# Altium PCB Copy of PCB1.PcbDoc (part 2 of 2)
Units mm, origin at the board's own origin, x right, y up, seen from the top; angles counter-clockwise.
Board outline 100 x 100 mm, 2 copper layers (Top Layer, Bottom Layer); 110 components, 80 nets, 503 pads, 102 vias.
Unrouted connection lines stored in the file: 45.
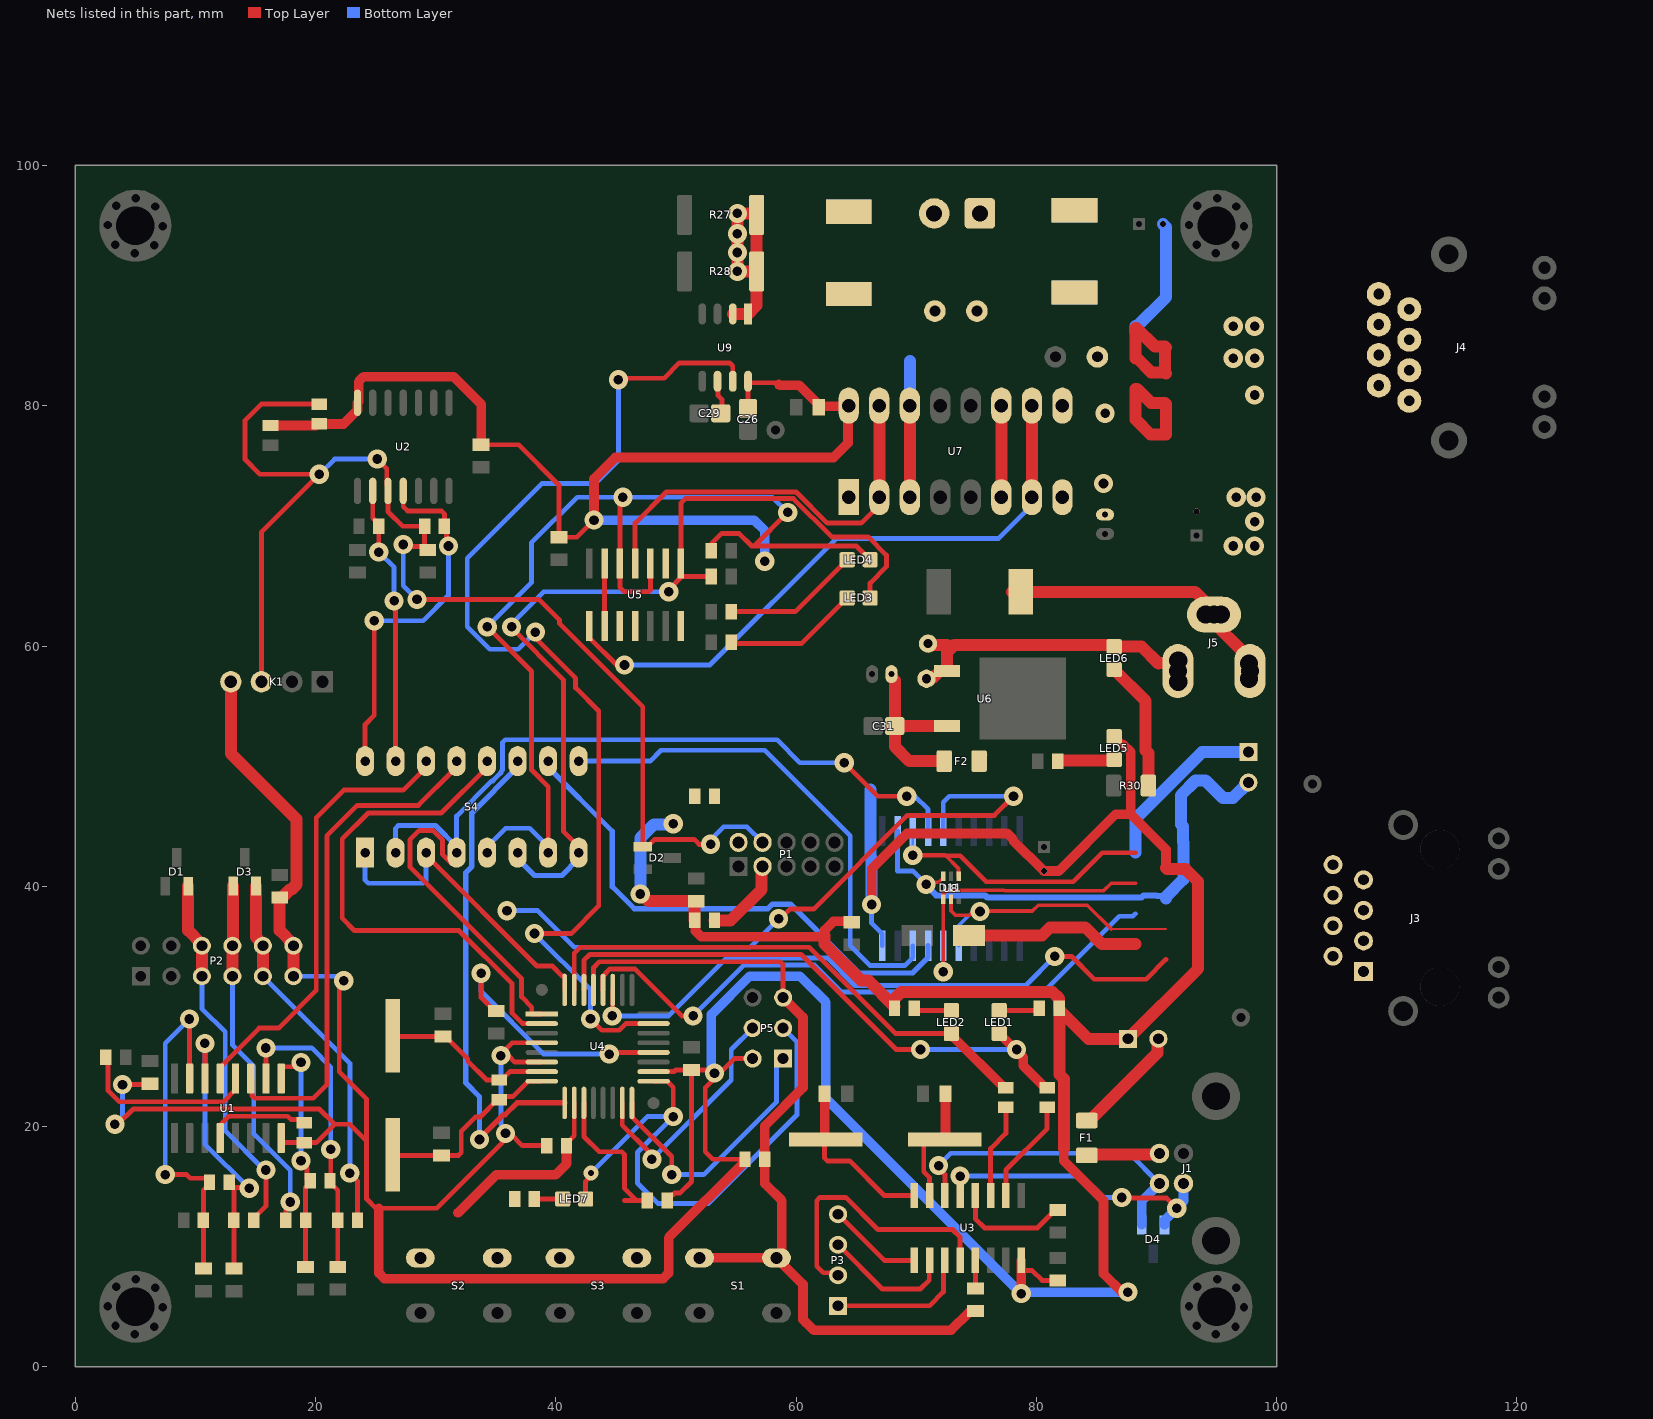
[diagram p2: the nets of this part, all layers, seen from the top]

## Via types
v1: diameter 1.6, hole 0.8, Top Layer to Bottom Layer, 101 vias
v2: diameter 1.27, hole 0.5, Top Layer to Bottom Layer, 1 vias

## Nets (pads, with @x,y where several pads share a name; then routed paths per layer and width w, separated by ;. In a path a pad name is that pad's centre, name@x,y a point inside that pad or via, vN(x,y) a via of type N, cw(c..) or ccw(c..) an arc to the next point about the centre after c; other vN are vias at no path point) (continued)
2A: C11.2 D2.1 K1.3 P1.4 R11.1 R20.1 U2.3 | length 104
  Top Layer w0.4: K1.3@15.494,57.023 15.494,69.469 20.066,74.041 20.066,74.295 15.367,74.295 14.136,75.526 14.136,78.779 15.493,80.136 R11.1@20.32,80.136 ; v1(25.146,75.565) 25.935,74.776 25.935,73.379 26.035,73.279 26.035,71.188 27.246,69.977 R20.1@29.083,69.977 29.083,68.25 29.046,68.287 27.471,68.287 v1(27.305,68.453) ; v1(28.448,63.881) 38.599,63.881 40.308,62.172 40.308,61.887 47.244,54.951 D2.1@47.244,43.307 47.624,43.307 48.224,43.907 51.519,43.907 51.935,43.491 v1(52.889,43.491) ; P1.4@57.152,43.718 P1.4@57.214,43.656
  Bottom Layer w0.4: v1(20.32,74.295) 21.59,75.565 v1(25.146,75.565) ; v1(27.305,68.453) 27.305,65.024 v1(28.448,63.881) ; v1(52.889,43.491) 52.946,43.548 52.946,43.929 53.975,44.958 55.912,44.958 P1.4@57.214,43.656
3: D1.1 P2.5 P2.6 R5.1 | length 31
  Top Layer w0.4: R5.1@14.859,12.192 14.859,12.367 15.875,13.383 v1(15.875,16.383)
  Top Layer w1: D1.1@9.398,40.005 9.398,36.33 10.541,35.187 P2.6@10.541,35.052 P2.5@10.541,32.512
  Bottom Layer w0.4: P2.5@10.541,32.512 10.541,29.823 12.481,27.883 12.481,19.65 15.748,16.383 v1(15.875,16.383)
4: D3.2 P2.7 P2.8 R6.1 | length 30
  Top Layer w0.4: R6.1@17.527,12.192 17.527,13.336 v1(17.907,13.716)
  Top Layer w1: P2.7@13.081,32.512 P2.8@13.081,35.052 13.114,35.085 13.114,39.985 D3.2@13.147,40.018
  Bottom Layer w0.4: P2.7@13.081,32.512 13.081,26.797 14.859,25.019 14.859,19.394 17.907,16.346 v1(17.907,13.716)
5: D3.1 P2.9 P2.10 R7.2 | length 31.3
  Top Layer w0.4: v1(22.86,16.129) 23.495,15.494 R7.2@23.495,12.192
  Top Layer w1: D3.1@15.047,40.018 15.047,35.761 15.621,35.187 P2.10@15.621,35.052 P2.9@15.621,32.512
  Bottom Layer w0.4: P2.9@15.621,32.512 22.86,25.273 v1(22.86,16.129)
6: C1.1 C2.1 C8.1 C12.1 C13.1 C14.1 C21.1 C22.1 C24.POS C25.2 C26.2 F2.2 J3.8 K1.4 LED5.A P2.11 P2.12 P4.1 P5.2 R1.2 R2.1 R3.1 R10.2 R11.2 R13.1 R15.2 R17.1 R18.1 R21.1 R31.1 U1.16 U2.14 U3.16 U4.4 U4.6 U4.18 U5.14 U7.16 U8.20 U9.8 | length 512.5
  Top Layer w0.4: v1(3.302,20.193) 3.556,20.193 4.826,21.463 20.32,21.463 21.59,20.193 ; v1(3.937,23.495) 6.147,23.495 C12.1@6.223,23.571 ; U1.16@17.145,19.05 17.145,18.769 17.245,18.669 R13.1@19.05,18.669 20.066,18.669 21.59,20.193 ; v1(22.352,32.131) 21.971,31.75 21.971,24.575 24.257,22.289 24.257,18.796 ; C13.1@33.782,76.759 36.906,76.759 40.259,73.406 C22.1@40.259,69.063 41.758,69.063 v1(43.18,70.485) ; U4.6@38.842,25.371 36.605,25.371 36.068,25.908 v1(35.433,25.908) 35.433,26.035 36.369,26.971 U4.4@38.842,26.971 ; R18.1@39.243,18.415 37.211,18.415 36.195,19.431 v1(35.814,19.431) 35.595,19.212 35.595,18.704 30.099,13.208 25.019,13.208 24.257,13.97 24.257,18.796 ; U4.18@48.142,24.571 49.866,24.571 50.01,24.714 C14.1@51.308,24.714 ; R21.1@49.275,13.843 49.275,14.018 49.55,14.293 49.725,14.293 49.891,14.459 50.34,14.459 51.308,15.427 C14.1@51.308,24.714 ; C2.1@51.562,38.633 51.688,38.759 C2.1@51.689,38.76 ; v1@53.435,24.225 52.451,23.241 52.451,17.907 53.086,17.272 R17.1@55.753,17.272 ; C26.2@56.007,79.767 U9.8@56.007,82.03 ; U9.8@56.007,82.042 U9.8@56.007,82.03 ; P5.2@56.388,25.654 54.864,25.654 53.911,24.701 53.899,24.714 C14.1@51.308,24.714 ; 58.547,81.788 58.42,81.915 56.122,81.915 U9.8@56.007,82.03 ; F2.2@75.237,50.419 F2.2@75.745,50.927 ; U3.16@78.74,8.13 78.858,8.012 79.662,8.012 80.485,7.188 C8.1@81.788,7.188 ; 87.851,46.007 87.851,46.054 ; 21.59,20.193 22.86,20.193 24.257,18.796
  Top Layer w0.8: R15.2@16.256,78.358 20.017,78.358 20.145,78.486 R11.2@20.32,78.486 22.33,78.486 23.495,79.651 U2.14@23.495,80.251 23.595,80.351 23.595,82.015 24.003,82.423 31.496,82.423 33.782,80.137 C13.1@33.782,76.759 ; 25.273,13.208 25.273,7.801 25.742,7.332 48.934,7.332 49.403,7.801 49.403,10.747 55.753,17.097 R17.1@55.753,17.272 ; v1(43.18,70.485) 43.18,73.914 44.958,75.692 63.119,75.692 64.325,76.898 64.325,79.947 61.963,79.947 61.963,80.01 60.275,81.698 58.637,81.698 58.547,81.788 ; R10.2@51.562,37.16 51.637,37.085 51.637,36.283 52.106,35.814 62.357,35.814 ; v1(53.213,24.447) v1@53.213,24.638 ; v1@57.314,67.146 v1(57.404,67.056) ; 62.357,35.91 62.357,36.322 63.119,37.084 64.465,37.084 64.592,36.957 C25.2@64.643,37.008 ; v1(66.294,38.481) 66.294,41.456 69.237,44.399 77.597,44.399 78.032,43.964 78.032,43.869 80.626,41.275 C24.POS@80.645,41.275 81.882,41.275 86.614,46.007 87.851,46.007 90.795,43.063 90.795,41.529 ; v1(78.74,6.096) 78.74,8.13 U3.16@78.74,8.862 ; 82.296,18.161 82.296,17.145 85.598,13.843 85.598,7.747 87.122,6.223 v1(87.63,6.223) ; LED5.A@86.487,52.451 87.157,51.781 87.278,51.781 87.851,51.208 87.851,46.054
  Top Layer w1: K1.4@12.954,57.023 12.954,51.054 18.417,45.591 18.417,40.147 18.006,39.737 17.88,39.737 17.209,39.065 C1.1@17.018,39.065 17.018,36.33 18.161,35.187 P2.12@18.161,35.052 P2.11@18.161,32.512 ; v1(47.042,39.36) 47.115,39.36 47.715,38.759 C2.1@51.688,38.759 ; R10.2@51.562,37.16 C2.1@51.562,38.633 ; 62.357,35.91 62.357,35.814 62.357,35.218 65.407,32.168 66.012,32.168 R3.1@68.199,29.98 ; 68.199,30.626 68.785,31.212 81.333,31.212 81.889,30.656 81.889,29.87 R2.1@81.914,29.845 R2.1@81.914,29.72 ; 82.296,18.161 82.296,23.959 81.914,24.341 R2.1@81.914,29.72 ; 90.795,41.529 90.891,41.433 92.425,41.433 93.472,40.386 93.472,33.147 P4.1@87.63,27.305 84.329,27.305 R2.1@81.914,29.72
  Bottom Layer w0.4: v1(3.302,20.193) 3.937,20.828 v1(3.937,23.495) ; P2.11@18.161,32.512 v1@21.736,32.512 ; v1(35.433,25.908) 35.433,20.193 35.814,19.812 v1(35.814,19.431) ; v1(66.294,38.481) 66.294,36.924 67.183,36.035 U8.20@67.183,35.052
  Bottom Layer w0.8: v1(43.18,70.485) 56.515,70.485 57.404,69.596 v1(57.404,67.056) ; v1(53.213,24.447) 52.959,24.701 52.959,29.337 56.134,32.512 60.325,32.512 62.484,30.353 62.484,22.352 v1(78.74,6.096) 78.867,6.223 v1(87.63,6.223)
  Bottom Layer w1: v1(47.042,39.36) 47.042,44.019 48.183,45.16 49.732,45.16 v1(49.784,45.212) ; 66.216,48.055 66.216,42.387 66.294,42.309 v1(66.294,38.481)
A+: C5.1 R6.2 R9.2 U1.1 | length 20.2
  Top Layer w0.4: U1.1@17.145,24 17.145,24.875 17.245,24.975 18.371,24.975 18.602,25.206 18.659,25.206 v1(18.796,25.343) ; v1(18.796,17.154) 18.796,17.037 19.284,16.549 19.284,15.594 19.559,15.319 19.177,14.937 R6.2@19.177,12.192 C5.1@19.177,8.306
  Bottom Layer w0.4: v1(18.796,17.154) v1(18.796,25.343)
A-: C6.1 R7.1 R9.1 U1.2 | length 25.5
  Top Layer w0.4: U1.2@15.875,24 v1(15.875,26.543) ; v1(21.273,18.098) 21.273,15.382 21.209,15.319 21.845,14.683 R7.1@21.845,12.192 C6.1@21.844,8.306 C6.1@21.844,8.306
  Bottom Layer w0.4: v1(15.875,26.543) 19.685,26.543 21.273,24.956 v1(21.273,18.098)
B+: C3.1 R4.2 R8.2 U1.7 | length 30.1
  Top Layer w0.4: v1(7.493,16.002) 9.271,16.002 9.573,15.7 10.901,15.7 11.176,15.425 11.176,15.192 10.667,14.683 R4.2@10.667,12.192 C3.1@10.668,8.179 C3.1@10.668,8.179 ; v1(9.506,28.956) 9.516,28.947 9.516,24.009 U1.7@9.525,24
  Bottom Layer w0.4: v1(7.493,16.002) 7.493,26.924 9.506,28.937 v1(9.506,28.956)
B-: C4.1 R5.2 R8.1 U1.6 | length 25.3
  Top Layer w0.4: U1.6@10.795,24 v1(10.795,26.924) ; R8.1@12.826,15.367 12.826,15.192 R8.1@13.101,14.917 ; C4.1@13.208,8.179 C4.1@13.208,8.179 R5.2@13.209,12.192 13.209,14.809 R8.1@13.101,14.917 ; v1(14.478,14.859) 14.42,14.917 R8.1@13.101,14.917
  Bottom Layer w0.4: v1(10.795,26.924) 10.795,18.542 v1(14.478,14.859)
D: D11.3 J3.6 P6.2 U8.2 | length 45.1
  Top Layer w0.2: D11.3@72.173,40.64 72.248,40.715 D11.3@72.248,40.828
  Top Layer w0.3: v1(70.83,40.155) 71.016,40.341 71.874,40.341 D11.3@72.173,40.64
  Bottom Layer w0.4: U8.2@68.453,44.602 68.453,41.275 69.71,41.275 v1(70.83,40.155)
  Bottom Layer w0.5: v1(70.83,40.155) 70.83,40.086 71.673,39.243 75.74,39.243 75.924,39.059 88.752,39.059 88.936,39.243 90.002,39.243 90.065,39.18 90.604,39.18 90.795,38.989
  Bottom Layer w1: 90.795,38.989 90.795,39.124 92.245,40.574 92.245,43.656 92.205,43.696 92.205,44.987 92.028,45.164 92.028,47.578 93.252,48.802 94.081,48.802 95.538,47.345 96.367,47.345 P6.2@97.663,48.641
Dir: LED4.A R23.1 S4.5 S4.7 U5.3 U5.5 | length 91.5
  Top Layer w0.4: v1(34.29,61.595) 37.98,57.905 37.98,49.683 39.37,48.293 S4.7@39.37,42.799 ; v1(45.593,72.39) 45.593,72.155 45.339,71.901 U5.5@45.339,66.853 45.339,64.897 45.72,64.516 47.752,64.516 47.879,64.643 U5.3@47.879,66.853 ; R23.1@52.959,68.326 53.028,68.395 R23.1@53.235,68.395 ; R23.1@52.959,68.501 53.834,69.376 55.25,69.376 56.3,68.326 56.515,68.326 ; v1(59.309,71.12) 56.515,68.326 ; LED4.A@66.167,67.183 65.024,68.326 56.515,68.326
  Bottom Layer w0.4: S4.5@34.29,42.799 34.29,43.299 35.822,44.831 37.838,44.831 39.37,43.299 S4.7@39.37,42.799 ; v1(34.29,61.595) 37.973,65.278 37.973,68.58 41.783,72.39 v1(45.593,72.39) ; v1@45.625,72.422 45.657,72.39 58.039,72.39 v1(59.309,71.12)
Dir2: U5.6 U5.9 | length 5.2
  Top Layer w0.4: U5.9@44.069,61.671 U5.6@44.069,66.853
Dir_D: S4.10 U8.17 | length 43.8
  Bottom Layer w0.444: S4.10@39.37,50.419 39.37,49.919 44.704,44.585 44.704,39.969 46.535,38.137 57.659,38.137 58.041,38.519 59.525,38.519 65.264,32.78 69.704,32.78 70.993,34.069 U8.17@70.993,35.052
Dir_M: S4.12 U4.2 | length 43.3
  Top Layer w0.4: S4.12@34.29,50.419 34.29,49.919 30.472,46.101 24.384,46.101 22.225,43.942 22.225,37.338 23.241,36.322 31.944,36.322 36.35,31.915 36.35,29.464 37.243,28.571 U4.2@38.842,28.571
En2: U5.2 U5.11
En_A: S4.13 U1.3 | length 42.8
  Top Layer w0.4: U1.3@14.605,24 14.705,23.9 14.705,22.584 14.939,22.35 19.81,22.35 20.955,23.495 20.955,44.196 23.495,46.736 28.567,46.736 31.488,49.657 31.75,49.657 S4.13@31.75,50.419
En_A_2: R19.2 S4.15 U2.2 | length 23.6
  Top Layer w0.4: U2.2@24.765,73.279 24.765,70.659 25.272,70.152 R19.2@25.272,69.977 v1(25.272,67.819) ; v1(26.543,63.754) 26.67,63.627 S4.15@26.67,50.419
  Bottom Layer w0.4: v1(25.272,67.819) 26.543,66.548 v1(26.543,63.754)
En_A_COM: S4.2 S4.4 U4.1 U8.4 | length 84.7
  Top Layer w0.4: S4.4@31.75,42.799 31.75,42.299 31.348,41.897 30.56,42.684 30.56,43.858 29.769,44.649 28.651,44.649 27.86,43.858 27.86,41.609 37.15,32.319 37.15,30.795 38.008,29.937 38.008,29.371 U4.1@38.842,29.371 ; v1(64.008,50.292) 66.802,47.498 v1(69.215,47.498)
  Bottom Layer w0.4: S4.2@26.67,42.789 26.67,44.825 26.904,45.06 29.989,45.06 S4.4@31.75,43.299 ; S4.4@31.75,42.799 S4.4@31.75,43.299 ; v1(64.008,50.292) 60.325,50.292 58.42,52.197 35.794,52.197 35.56,51.963 35.56,49.657 35.44,49.537 35.44,49.443 34.766,48.769 34.672,48.769 31.75,45.847 S4.4@31.75,43.299 ; v1(69.215,47.498) 69.897,47.498 70.993,46.402 U8.4@70.993,44.602
En_A_out: D11.4 J3.5 U8.16 | length 25
  Top Layer w0.3: v1(72.263,32.893) 72.255,32.901 72.255,38.92 D11.4@72.248,38.928 72.273,38.953 72.273,39.373 72.578,39.678 77.334,39.678 77.388,39.624 85.598,39.624 86.233,40.259 88.255,40.259
  Bottom Layer w0.2: v1(72.263,32.893) U8.16@72.263,35.052
En_B: S4.14 U1.5 | length 37.4
  Top Layer w0.4: U1.5@12.065,24 12.065,24.95 15.309,28.194 16.926,28.194 20.066,31.334 20.066,45.72 22.352,48.006 27.297,48.006 29.21,49.919 S4.14@29.21,50.419
En_B_2: R20.2 S4.16 U2.4 | length 31.3
  Top Layer w0.4: S4.16@24.13,50.419 24.13,53.467 24.892,54.229 v1(24.892,62.103) ; U2.4@27.305,73.279 27.305,71.608 27.666,71.247 30.48,71.247 30.733,70.994 R20.2@30.733,69.977 30.904,69.806 30.904,68.493 v1(31.07,68.327)
  Bottom Layer w0.4: v1(24.892,62.103) 28.956,62.103 31.07,64.217 v1(31.07,68.327)
En_B_COM: S4.1 S4.3 U4.32 U8.5 | length 84
  Top Layer w0.4: S4.3@29.21,42.799 29.21,42.565 38.411,33.364 39.699,33.364 40.542,32.521 40.742,32.521 U4.32@40.742,31.371 ; v1(58.547,37.297) 58.687,37.297 59.49,38.1 61.468,38.1 69.273,45.905 76.512,45.905 v1(78.105,47.498)
  Bottom Layer w0.4: S4.1@24.13,42.799 24.13,40.513 24.384,40.259 28.976,40.259 29.21,40.493 S4.3@29.21,42.799 ; v1(35.941,37.973) 38.49,37.973 41.538,34.925 56.175,34.925 v1(58.547,37.297) ; U8.5@72.263,44.602 72.263,46.99 72.771,47.498 v1(78.105,47.498)
En_B_out: D11.5 J3.4 U8.15 | length 24.2
  Top Layer w0.2: 86.233,36.449 90.795,36.449
  Top Layer w0.3: D11.5@72.898,38.928 72.898,37.973 73.279,37.592 74.422,37.592 74.587,37.757 75.164,37.757 v1(75.311,37.904) ; v1@75.311,37.943 79.671,37.943 80.156,38.428 84.254,38.428 86.233,36.449
  Bottom Layer w0.3: U8.15@73.533,35.052 73.533,36.703 74.918,38.088 75.101,37.904 v1(75.311,37.904)
GND_M: D7.A D8.A R27.1 R28.1 U9.1 U9.2 | length 18.9
  Top Layer w1: U9.2@54.737,87.642 U9.1@56.007,87.642 56.721,88.356 R28.1@56.721,91.186 ; R27.1@56.721,96.901 R27.1@56.721,95.887 ; R28.1@56.721,91.186 v1(55.118,91.186) v1(55.118,96.012) 56.596,96.012 R27.1@56.721,95.887 ; R28.1@56.721,91.186 R27.1@56.721,95.885 R27.1@56.721,95.887
  other v1: 55.118,92.761 55.118,94.31
I_motor: U4.23 U9.7 | length 93.1
  Top Layer w0.4: v1(38.227,36.068) 41.275,36.068 43.579,38.372 43.579,54.592 41.656,56.515 41.656,57.323 38.532,60.447 38.532,60.933 v1(38.303,61.163) ; v1(42.894,28.958) 43.843,28.01 45.271,28.01 45.832,28.571 U4.23@48.142,28.571 ; v1(45.212,82.169) 45.339,82.296 49.022,82.296 50.292,83.566 54.483,83.566 54.737,83.312 U9.7@54.737,82.042
  Bottom Layer w0.4: v1(38.227,36.068) 42.894,31.401 v1(42.894,28.958) ; v1(38.303,61.163) 36.88,59.74 34.519,59.74 32.639,61.62 32.639,67.31 38.862,73.533 43.307,73.533 45.212,75.438 v1(45.212,82.169)
K1: R18.2 S2.2 S2.3 U4.10 | length 16.1
  Top Layer w0.4: R18.2@40.893,18.415 40.893,18.59 41.542,19.239 U4.10@41.542,21.971
  Top Layer w0.8: 31.863,12.813 35.052,16.002 40.005,16.002 40.893,16.89 R18.2@40.893,18.415
K2: R21.2 S3.2 S3.3 U4.11 | length 12.9
  Top Layer w0.4: U4.11@42.342,21.971 42.342,19.174 43.609,17.907 45.486,17.907 45.72,17.673 45.72,14.859 46.736,13.843 ; 45.725,13.843 46.736,13.843 ; R21.2@47.625,13.843 46.736,13.843
M1: C23.2 D6.A D8.K J2.2 U7.3 U7.14 | length 12.6
  Top Layer w1: U7.14@69.401,80.078 U7.14@69.469,80.01 U7.3@69.469,72.39 ; J2.2@71.501,96.012 71.271,95.782 71.283,95.782 J2.2@71.764,95.301
  Bottom Layer w1: U7.14@69.469,80.01 69.469,83.725 ; J2.2@71.501,96.012 J2.2@71.638,95.875
M2: C23.1 D5.A D7.K J2.1 U7.6 U7.11 | length 7.9
  Top Layer w1: U7.6@77.089,72.39 U7.11@77.089,80.01 U7.11@77.157,80.078
  Bottom Layer w1: J2.1@75.184,95.885 J2.1@75.311,96.012
NetC7_1: C7.1 U3.4 | length 9.7
  Top Layer w0.4: U3.4@74.93,14.252 74.93,12.319 75.692,11.557 80.099,11.557 81.597,13.056 C7.1@81.788,13.056
NetC9_1: C9.1 U3.13 | length 2.4
  Top Layer w0.4: C9.1@74.93,6.528 U3.13@74.93,8.862 U3.13@74.955,8.837
NetC15_2: C15.2 U3.7 X1.1 | length 10.2
  Top Layer w0.4: U3.7@71.12,14.252 71.12,15.748 70.631,16.237 70.631,18.523 71.031,18.923 X1.1@72.39,18.923
  Top Layer w0.8: X1.1@72.39,18.923 72.441,18.974 C15.2@72.441,22.733
NetC16_2: C16.2 U3.8 X1.2 | length 14.1
  Top Layer w0.4: X1.2@62.382,19.025 62.382,17.379 62.617,17.145 64.471,17.145 67.364,14.252 U3.8@69.85,14.252
  Top Layer w0.8: X1.2@62.382,19.025 C16.2@62.382,22.733
NetC17_2: C17.2 U4.20 | length 21.9
  Top Layer w0.4: v1(33.782,32.766) 33.782,30.745 34.91,29.616 C17.2@35.052,29.616 ; v1(44.45,26.035) 44.586,26.171 U4.20@48.142,26.171
  Bottom Layer w0.4: v1(33.782,32.766) 33.782,31.242 38.989,26.035 v1(44.45,26.035)
NetC18_1: C18.1 R22.1 U4.7 X2.2 | length 14.4
  Top Layer w0.4: X2.2@26.416,27.559 26.467,27.508 C18.1@30.607,27.508 30.797,27.508 32.673,25.633 32.673,25.442 34.24,23.875 R22.1@35.306,23.875 35.481,23.875 36.177,24.571 U4.7@38.842,24.571
NetC19_2: C19.2 R22.2 U4.8 X2.1 | length 16
  Top Layer w0.4: X2.1@26.416,17.653 26.467,17.602 C19.2@30.48,17.602 31.897,17.602 32.131,17.837 32.131,19.625 33.294,20.787 33.693,20.787 35.131,22.225 R22.2@35.306,22.225 35.581,22.5 36.421,22.5 37.692,23.771 U4.8@38.842,23.771
NetC29_1: C29.1 U9.6 | length 2.9
  Top Layer w0.4: U9.6@53.467,82.042 53.515,81.994 53.515,80.851 53.848,80.518 53.848,79.491 C29.1@53.732,79.375
NetC31_1: C31.1 C32.1 F2.1 U6.3 | length 15.1
  Top Layer w1: C32.1@67.945,57.658 67.945,57.408 68.221,57.132 C31.1@68.221,53.346 ; F2.1@72.337,50.419 69.435,50.419 68.221,51.633 C31.1@68.221,53.34 C31.1@68.221,53.346 ; U6.3@72.567,53.346 C31.1@68.221,53.346
NetD4_1: D4.1 J1.2 U3.6 | length 26.6
  Top Layer w0.4: v1(71.866,16.748) 71.866,16.526 72.39,16.002 U3.6@72.39,14.252
  Bottom Layer w0.4: v1(71.866,16.748) 72.898,17.78 87.732,17.78 J1.2@90.252,15.26
  Bottom Layer w0.8: D4.1@88.773,11.811 88.773,13.781 J1.2@90.252,15.26
NetD4_2: D4.2 J1.3 U3.5 | length 25.1
  Top Layer w0.4: U3.5@73.66,14.252 v1(73.66,15.875) ; v1(87.122,14.097) 87.172,14.047 90.851,14.047 v1(91.69,13.208)
  Bottom Layer w0.4: v1(73.66,15.875) 83.82,15.875 85.598,14.097 v1(87.122,14.097) ; J1.3@92.252,15.26 J1.3@92.252,15.537
  Bottom Layer w0.8: D4.2@90.673,11.811 90.673,12.191 92.252,13.77 J1.3@92.252,15.26
NetD9_K: D9.K J4.1 J4.2 J4.3 J4.4 J5.2 J5.3 pad.3 pad.4 pad.7 pad.8 | length 36.7
  Top Layer w1: D9.K@77.978,64.516 D9.K@78.24,64.516 ; D9.K@78.494,64.262 D9.K@78.24,64.516 ; J5.2@97.79,57.912 97.79,58.928 pad.8@94.107,62.611 95.123,62.611 93.218,64.516 D9.K@78.24,64.516 ; 88.255,78.867 89.525,77.597 90.795,77.597 90.795,80.137 90.699,80.233 89.565,80.233 88.39,81.407 88.255,81.407 88.255,78.867
NetD10_2: D10.C J3.1 | length 14.7
  Top Layer w1: D10.C@74.398,35.918 80.495,35.918 81.153,36.576 84.074,36.576 85.471,35.179 88.255,35.179
NetF1_1: F1.1 P4.2 | length 9.4
  Top Layer w1: F1.1@84.201,20.5 84.451,20.5 90.074,26.123 90.074,27.209 P4.2@90.17,27.305
NetF1_2: F1.2 J1.1 | length 6.1
  Top Layer w0.4: J1.1@90.172,17.68 J1.1@90.252,17.76
  Top Layer w1: F1.2@84.201,17.6 84.281,17.68 J1.1@90.172,17.68
NetLED1_A: LED1.A R2.2 | length 3.4
  Top Layer w0.4: LED1.A@76.915,29.654 80.073,29.654 R2.2@80.264,29.845
NetLED2_A: LED2.A R3.2 | length 3.2
  Top Layer w0.4: R3.2@69.849,29.855 70.05,29.654 LED2.A@72.936,29.654
NetLED3_K: LED3.K R25.1 | length 11.3
  Top Layer w0.4: R25.1@54.609,60.325 54.736,60.198 60.452,60.198 LED3.K@64.262,64.008
NetLED4_K: LED4.K R26.1 | length 11.4
  Top Layer w0.4: R26.1@54.609,62.865 59.944,62.865 LED4.K@64.262,67.183
NetLED5_K: LED5.K R29.2 | length 4.8
  Top Layer w1: R29.2@81.788,50.419 81.788,50.457 81.813,50.482 86.423,50.482 LED5.K@86.487,50.546
NetLED6_K: LED6.K R30.1 | length 10.8
  Top Layer w1: LED6.K@86.487,58.039 89.101,55.425 89.101,51.308 89.334,51.075 R30.1@89.334,48.387
NetLED7_A: LED7.A R31.2 | length 2.3
  Top Layer w0.4: R31.2@38.354,13.843 38.481,13.97 LED7.A@40.576,13.97
NetLED7_K: LED7.K P5.3 U4.17 | length 47
  Top Layer w0.4: LED7.K@42.481,13.97 42.481,15.449 42.926,15.894 v2(42.926,16.129) ; U4.17@48.142,23.771 49.292,23.771 49.784,23.279 v1(49.784,20.828)
  Bottom Layer w0.4: v2(42.926,16.129) 47.625,20.828 v1(49.784,20.828) 46.806,17.85 46.806,15.297 48.514,13.589 52.705,13.589 60.078,20.962 60.078,27.044 P5.3@58.928,28.194
NetP1_2: P1.2 R1.1
NetP1_3: P1.3 R10.1 | length 6.9
  Top Layer w1: R10.1@53.212,37.16 54.559,37.16 57.137,39.738 57.137,41.579 P1.3@57.214,41.656
NetP3_1: P3.1 U3.11 | length 11.9
  Top Layer w0.4: P3.1@63.5,5.08 71.12,5.08 72.272,6.232 72.272,8.745 U3.11@72.39,8.862
NetP3_2: P3.2 U3.12 | length 22.9
  Top Layer w0.4: P3.2@63.5,7.62 63.29,7.83 62.274,7.83 61.722,8.382 61.722,13.843 61.976,14.097 64.135,14.097 66.802,11.43 73.025,11.43 73.66,10.795 U3.12@73.66,8.862
NetP3_3: P3.3 U3.10 | length 11.1
  Top Layer w0.4: P3.3@63.5,10.16 67.183,6.477 70.358,6.477 71.093,7.212 71.093,8.835 U3.10@71.12,8.862
NetP3_4: P3.4 U3.9 | length 7.9
  Top Layer w0.4: P3.4@63.5,12.7 67.338,8.862 U3.9@69.85,8.862
NetP5_1: P5.1 U4.16 | length 22.4
  Top Layer w0.4: U4.16@46.342,21.971 46.342,20.821 49.657,17.506 v1(49.657,16.002)
  Bottom Layer w0.4: v1(49.657,16.002) 52.324,16.002 58.378,22.056 58.378,25.104 P5.1@58.928,25.654
NetP5_4: P5.4 U4.15 | length 20.1
  Top Layer w0.4: U4.15@45.542,21.971 45.542,20.117 47.776,17.883 47.776,17.502 v1(48.006,17.272)
  Bottom Layer w0.4: v1(48.006,17.272) 54.61,23.876 54.61,26.416 P5.4@56.388,28.194
NetR12_2: R12.2 U1.4 | length 15.2
  Top Layer w0.4: R12.2@2.54,25.781 2.737,25.584 2.737,22.998 3.672,22.063 12.348,22.063 13.335,23.05 U1.4@13.335,24
NetR13_2: R13.2 U1.12 | length 8.6
  Top Layer w0.4: U1.12@12.065,19.05 12.165,19.15 12.165,20.235 12.793,20.863 17.687,20.863 17.956,20.594 18.775,20.594 R13.2@19.05,20.319
NetR14_2: R14.2 U3.3 | length 7.9
  Top Layer w0.4: U3.3@76.2,14.252 76.2,18.161 77.47,19.431 R14.2@77.47,21.591
NetR16_2: R16.2 U3.2 | length 8.8
  Top Layer w0.4: U3.2@77.47,14.252 77.47,16.383 80.899,19.812 R16.2@80.899,21.591
NetU5_4: U5.4 U7.2 U7.15 | length 34.7
  Top Layer w0.4: U5.4@46.609,66.853 46.609,70.231 49.198,72.82 60.013,72.82 62.602,70.231 65.432,70.231 66.929,71.728 U7.2@66.929,72.39
  Top Layer w1: U7.2@66.929,72.39 U7.15@66.929,80.01
NetU5_8: U5.8 U7.7 U7.10 | length 52.5
  Top Layer w0.4: U5.8@42.799,61.671 42.799,60.688 45.067,58.42 v1(45.72,58.42)
  Top Layer w1: U7.7@79.629,72.39 U7.10@79.629,80.01
  Bottom Layer w0.4: v1(45.72,58.42) 52.832,58.42 63.373,68.961 76.862,68.961 79.629,71.728 U7.7@79.629,72.39
NetU5_10: U5.10 U7.1 U7.9
P: D11.1 J3.7 P6.1 U8.3 | length 39.2
  Top Layer w0.3: 72.417,42.591 72.463,42.545 73.523,41.485 73.523,40.853 D11.1@73.548,40.828
  Top Layer w0.4: v1(69.723,42.591) 72.417,42.591 ; 72.463,42.545 73.66,42.545 75.819,40.386 83.079,40.386 85.492,42.799 88.255,42.799
  Bottom Layer w0.2: v1(69.723,42.591) U8.3@69.723,44.602
  Bottom Layer w1: 88.255,42.799 88.255,45.632 93.218,50.595 93.804,51.181 P6.1@97.663,51.181
Pwm: LED3.A R24.1 S4.6 S4.8 U5.1 | length 76.5
  Top Layer w0.4: v1(36.322,61.595) 36.322,61.517 40.64,57.199 40.64,44.569 41.91,43.299 S4.8@41.91,42.799 ; v1(49.403,64.516) 49.403,64.687 U5.1@50.502,65.786 ; R24.1@52.959,65.786 U5.1@50.502,65.786 ; LED3.A@66.167,64.008 66.167,65.243 67.525,66.601 67.525,67.567 66.005,69.088 62.967,69.088 59.785,72.27 50.787,72.27 50.419,71.902 50.419,65.869 U5.1@50.502,65.786
  Bottom Layer w0.4: v1(36.322,61.595) 36.322,61.849 38.989,64.516 v1(49.403,64.516)
  Bottom Layer w0.444: S4.6@36.83,42.799 36.83,42.164 36.965,42.164 38.235,40.894 40.505,40.894 41.91,42.299 S4.8@41.91,42.799
Pwm_D: S4.9 U8.18 | length 42.2
  Bottom Layer w0.4: S4.9@41.91,50.419 47.854,50.419 48.762,51.327 57.396,51.327 64.516,44.207 64.516,35.053 66.167,33.402 69.056,33.402 69.723,34.069 U8.18@69.723,35.052
Pwm_M: S4.11 U4.9 | length 42.2
  Top Layer w0.444: v1(33.655,18.923) 33.655,19 35.651,20.996 35.799,20.996 36.774,21.971 U4.9@40.742,21.971
  Bottom Layer w0.444: v1(33.655,18.923) 33.655,22.479 32.512,23.622 32.512,41.148 33.02,41.656 33.02,46.109 36.83,49.919 S4.11@36.83,50.419
RST: C9.2 P5.5 R17.2 S1.2 S1.3 U4.29 | length 73
  Top Layer w0.4: U4.29@43.142,31.371 43.142,33.237 43.626,33.721 58.694,33.721 58.928,33.487 P5.5@58.928,30.734
  Top Layer w0.8: S1.3@51.972,9.069 S1.2@58.372,9.069 ; P5.5@58.928,30.734 60.579,29.083 60.579,23.241 57.403,20.065 R17.2@57.403,17.272 57.403,15.241 58.815,13.829 58.815,9.512 S1.2@58.372,9.069 ; C9.2@74.93,4.648 74.822,4.54 74.39,4.54 72.898,3.048 61.595,3.048 61.468,3.048 60.833,3.683 60.579,3.937 60.579,5.842 60.579,6.862 S1.2@58.372,9.069
RX: LED2.K R14.1 U4.31 | length 44.1
  Top Layer w0.4: U4.31@41.542,31.371 41.542,34.437 42.026,34.921 61.091,34.921 68.263,27.749 LED2.K@72.936,27.749
  Top Layer w0.8: LED2.K@72.936,27.749 73.171,27.515 73.171,27.365 77.295,23.241 R14.1@77.47,23.241
SCL: J3.3 U4.28 | length 52.7
  Top Layer w0.4: U4.28@43.942,31.371 43.942,32.521 44.142,32.721 44.142,32.77 44.493,33.121 46.591,33.121 50.502,29.21 v1(51.435,29.21)
  Bottom Layer w0.4: v1(51.435,29.21) 55.661,33.436 61.56,33.436 63.803,31.193 80.596,31.193 86.912,37.509 88.045,37.509 88.255,37.719
SDA: J3.2 U4.27 | length 53.7
  Top Layer w0.4: v1(44.704,29.21) 44.742,29.248 U4.27@44.742,31.371 ; v1(81.534,34.163) 82.931,34.163 84.836,32.258 89.144,32.258 90.795,33.909
  Bottom Layer w0.4: v1(44.704,29.21) 49.403,29.21 54.229,34.036 62.611,34.036 64.904,31.743 79.114,31.743 v1(81.534,34.163)
TX: LED1.K R16.1 U4.30 | length 48.2
  Top Layer w0.4: U4.30@42.342,31.371 42.342,33.837 42.826,34.321 60.421,34.321 68.326,26.416 v1(70.358,26.416)
  Top Layer w0.8: LED1.K@76.915,27.749 78.899,25.765 78.899,25.066 80.724,23.241 R16.1@80.899,23.241
  Bottom Layer w0.4: v1(70.358,26.416) v1(78.359,26.416)
Vm: C20.POS C27.2 C28.POS C30.1 D5.K D6.K J4.5 J4.6 J4.7 J4.8 J5.1 LED6.A pad.5 pad.6 pad.15 pad.16 U6.1 U7.8 | length 46.8
  Top Layer w1: pad.16@70.866,57.277 70.966,57.377 71.438,57.377 71.967,57.906 U6.1@72.567,57.906 72.567,59.485 73.153,60.071 86.36,60.071 LED6.A@86.487,59.944 88.773,59.944 90.17,58.547 pad.5@91.821,58.801 ; pad.15@70.993,60.198 71.093,60.098 72.54,60.098 72.567,60.071 ; U7.8@82.169,72.39 U7.8@82.296,72.263 ; 90.795,82.677 90.699,82.773 ; 90.795,84.836 90.699,84.932 ; 90.699,82.773 89.565,82.773 88.39,83.947 88.255,83.947 88.255,86.487 88.326,86.487 89.882,84.932 90.699,84.932 ; 90.699,82.773 90.699,84.932
  Bottom Layer w1: 88.255,86.106 88.255,86.622 ; 88.255,86.487 90.805,89.037 90.805,94.869 C20.POS@90.551,95.123
  other v1: 96.393,68.326 98.171,68.326 98.171,70.358 96.647,72.39 98.298,72.39 85.598,73.533 85.725,79.375 98.171,80.899 96.393,83.947 98.171,83.947 96.393,86.614 98.171,86.614
pads on no net: C26.0 C29.0 C31.0 D11.6 F1.0 F2.0 J3.9 J3.10 J3.11 J3.12 J3.13 J3.14 J3.C J3.D J4.0 J4.9 J4.10 J4.11 J4.12 J4.13 LED1.0 LED2.0 LED3.0 LED4.0 LED5.0 LED6.0 LED7.0 P1.7 P1.8 P1.9 P1.10 R27.0 R28.0 R30.0 U1.9 U1.10 U1.11 U1.13 U1.14 U1.15 U2.0 U2.5 U2.6 U2.8 U2.9 U2.10 U2.11 U2.12 U2.13 U3.14 U3.15 U4.12 U4.13 U4.14 U4.19 U4.22 U4.24 U4.25 U4.26 U4.F1 U4.F2 U5.12 U5.13 U8.6 U8.7 U8.8 U8.9 U8.11 U8.12 U8.13 U8.14

## Keep-outs
Keep-Out Layer:
  lines w0.254: 45.085,101.346 45.085,109.346 64.085,109.346 64.085,101.346 45.085,101.346

## Other copper
Top Layer:
  rectangle net Vm: 84.201,71.12 86.995,84.963
  rectangle net Vm: 81.026,70.612 86.995,74.168
  rectangle net Vm: 95.631,66.294 99.441,83.439
  rectangle net Vm: 86.487,83.058 99.441,88.138
  rectangle net 1: 80.264,82.042 83.693,85.217
  rectangle net 1: 70.739,82.042 83.693,83.185
  rectangle net M2: 73.787,86.614 76.581,98.044
  rectangle net M1: 70.104,86.614 73.025,98.044
  rectangle net GND_M: 76.962,85.471 85.598,90.805
  rectangle net GND_M: 61.341,83.82 80.01,86.36
  rectangle net GND_M: 61.341,83.82 67.056,91.44
  rectangle net GND_M: 59.563,87.757 67.056,91.567
  rectangle net GND_M: 56.896,87.757 59.69,97.917
  rectangle net M2: 73.787,93.345 85.344,98.044
  rectangle net M1: 61.849,93.345 73.025,98.044
  rectangle net 1: 73.406,67.691 86.741,70.104
  rectangle net NetD9_K: 87.376,65.151 91.567,81.28
  rectangle net NetD9_K: 94.996,54.737 99.441,65.532
  rectangle net NetD9_K: 76.962,60.96 97.663,65.532
  rectangle net 1: 70.739,62.484 73.787,74.168
  rectangle net 1: 70.739,69.723 75.819,82.804
Bottom Layer:
  rectangle net Vm: 87.63,83.058 98.425,88.138
  rectangle net Vm: 95.631,72.39 99.441,88.138
  rectangle net Vm: 84.328,83.058 92.329,88.011
  rectangle net M2: 73.66,85.471 78.105,89.027
  rectangle net M1: 68.453,85.471 72.898,89.027
  rectangle net M2: 76.073,78.486 78.105,88.646
  rectangle net M1: 68.453,78.613 70.485,88.773
  rectangle net Vm: 61.722,89.408 85.725,92.964
  rectangle net M2: 73.787,93.345 85.344,98.044
  rectangle net M1: 61.849,93.345 73.025,98.044
  rectangle net 1: 75.184,52.197 82.423,56.007
  rectangle net 1: 84.582,67.691 94.361,70.104
  rectangle net Vm: 87.376,58.42 91.948,67.056
  rectangle net Vm: 94.996,65.024 99.441,72.644
  rectangle net Vm: 87.376,65.024 97.79,67.437
  rectangle net Vm: 86.868,70.612 95.885,72.644
  rectangle net Vm: 81.534,85.598 85.09,88.9
  rectangle net Vm: 84.328,70.612 86.995,88.011
  rectangle net Vm: 81.026,70.612 86.995,74.168
  rectangle net Vm: 69.85,56.261 83.058,61.214
  rectangle net Vm: 82.677,55.372 93.599,60.579
  rectangle net GND_M: 54.102,86.487 58.039,97.917
  rectangle net 1: 61.976,75.184 71.374,78.105
  rectangle net 1: 70.739,75.184 75.692,82.804
  rectangle net 1: 53.594,73.152 62.738,79.502
  rectangle net 1: 49.276,73.152 53.848,97.917

## Silkscreen, mask and mechanical layers (free items; w line width, h text height)
Top Overlay:
  circle w0.4: c95,95 r3.506
  circle w0.4: c95,5 r3.506
  circle w0.4: c5.005,5 r3.506
  circle w0.4: c5,95 r3.506
  lines w0.254: 0.762,60.071 51.308,60.071 ; 10.16,84.201 33.02,84.201 ; 10.287,92.202 32.893,92.202 ; 10.287,96.266 32.893,96.266 ; 60.452,89.408 60.452,97.917 ; 60.579,60.071 60.579,76.2 ; 60.579,81.153 60.579,82.804
  text "ACRRL" at 10.333,96.947 h1.2
  text "Dr.Asemani" at 10.46,94.788 h1.2
  text "Shiraz University" at 10.46,93.156 h1.2
  text "Designer:" at 10.333,90.743 h1.2
  text "Mohammad Sabouri" at 10.333,88.692 h1.2
  text "09360226014" at 10.333,86.914 h1.2
  text "Mohamadsabory@yahoo.com" at 10.333,85.155 h1.2
  text "B" at 15.286,53.767 h1.2
  text "A" at 17.572,53.64 h1.2
  text "Gnd" at 21.036,52.751 h1.2 r90
  text "+5V" at 12.908,52.497 h1.2 r90
  text "B" at 56.942,45.639 h1.2
  text "Gnd" at 59.517,45.258 h1.2 r90
  text "A" at 58.847,38.654 h1.2
  text "+5V" at 57.739,37.638 h1.2 r90
  text "Gnd" at 3.256,32.431 h1.2 r90
  text "B+" at 8.59,27.986 h1.2 r90
  text "B-" at 11.13,27.986 h1.2 r90
  text "A+" at 13.67,27.986 h1.2 r90
  text "A-" at 16.21,27.986 h1.2 r90
  text "DC Motor Driver & Controller" at 27.732,1.316 h1.2
Bottom Overlay:
  lines w0.254: 10.16,84.201 33.02,84.201 ; 10.287,92.202 32.893,92.202 ; 10.287,96.266 32.893,96.266
  text "ACRRL" at 32.847,96.947 h1.2
  text "Dr.Asemani" at 32.72,94.788 h1.2
  text "Shiraz University" at 32.72,93.156 h1.2
  text "Designer:" at 32.847,90.743 h1.2
  text "Mohammad Sabouri" at 32.847,88.692 h1.2
  text "POWER" at 94.823,87.33 h1.2 r90
  text "09360226014" at 32.847,86.914 h1.2
  text "Mohamadsabory@yahoo.com" at 32.847,85.155 h1.2
  text "POWER" at 92.029,63.927 h1.2
  text "DATA_IN" at 91.648,46.293 h1.2
  text "USB" at 90.124,22.144 h1.2
  text "DC Motor Driver & Controller" at 53.929,1.316 h1.2
Mechanical 1:
  the board outline again, w0.254

## Text inside footprints (layer, text, board x,y; h text height)
D1: Mechanical 15 "Q3" at 8.048,41.455 h0.5 r180
D2: Mechanical 15 "Q3" at 48.694,41.957 h0.5 r90
D3: Mechanical 15 "Q3" at 13.697,41.468 h0.5 r180
D4: Mechanical 15 "Q3" at 89.307,10.195 h0.5
J3: Top Overlay "7" at 109.741,40.414 h1.2 r90; Top Overlay "1" at 109.741,32.914 h1.2 r90
P2: Top Overlay "+5v" at 20.066,35.56 h1.2 r270
P5: Top Overlay "6" at 56.896,32.258 h1.2 r90; Top Overlay "5" at 59.436,32.258 h1.2 r90; Top Overlay "2" at 56.896,23.114 h1.2 r90; Top Overlay "1" at 59.436,23.622 h1.2 r90
S4: Top Overlay "ON" at 32.36,48.449 h1.2; Top Overlay "1" at 24.029,44.094 h1.2; Top Overlay "2" at 26.293,44.094 h1.2; Top Overlay "3" at 28.853,44.094 h1.2; Top Overlay "4" at 31.414,44.094 h1.2; Top Overlay "5" at 33.974,44.094 h1.2; Top Overlay "6" at 36.535,44.094 h1.2; Top Overlay "7" at 39.095,44.094 h1.2; Top Overlay "8" at 41.656,44.094 h1.2